# Altium PCB PCI Express Mini_3000X2680_52PIN_Half-Mini-Type H2.PCBDOC
Units mm, origin at the board's own origin, x right, y up, seen from the top; angles counter-clockwise.
Board outline 30 x 26.8 mm, 4 copper layers (TopLayer, InternalPlane1, InternalPlane2, BottomLayer); 19 components, 38 nets, 168 pads, 22 vias.
Unrouted connection lines stored in the file: 69.
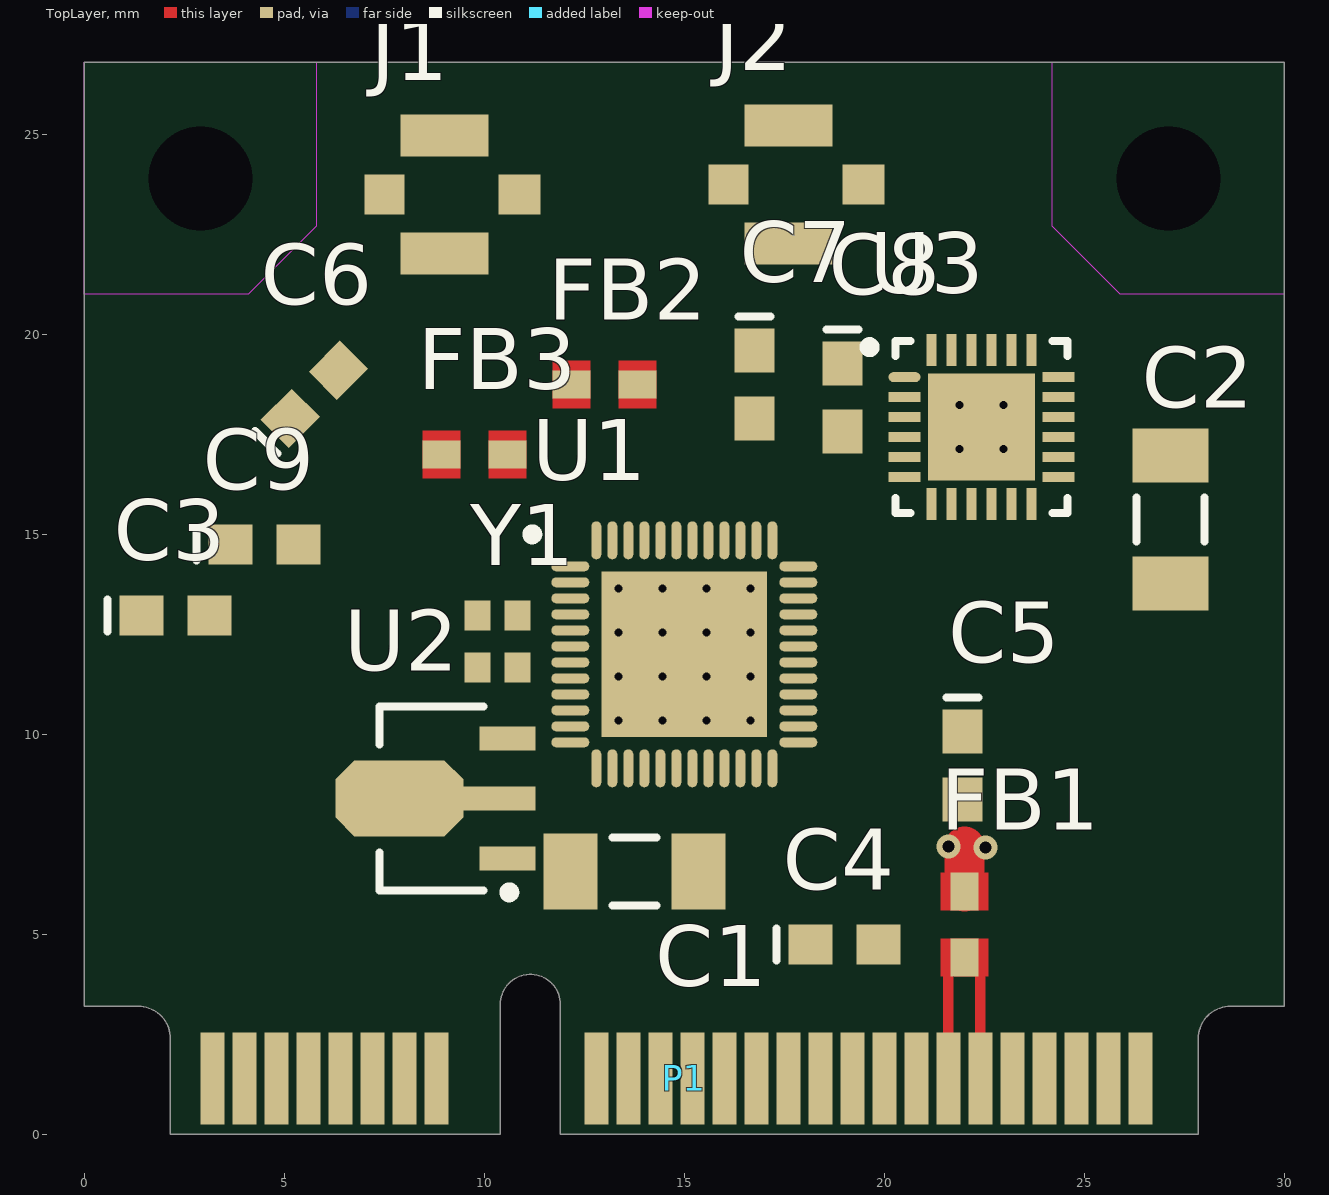
[diagram p0: TopLayer view]
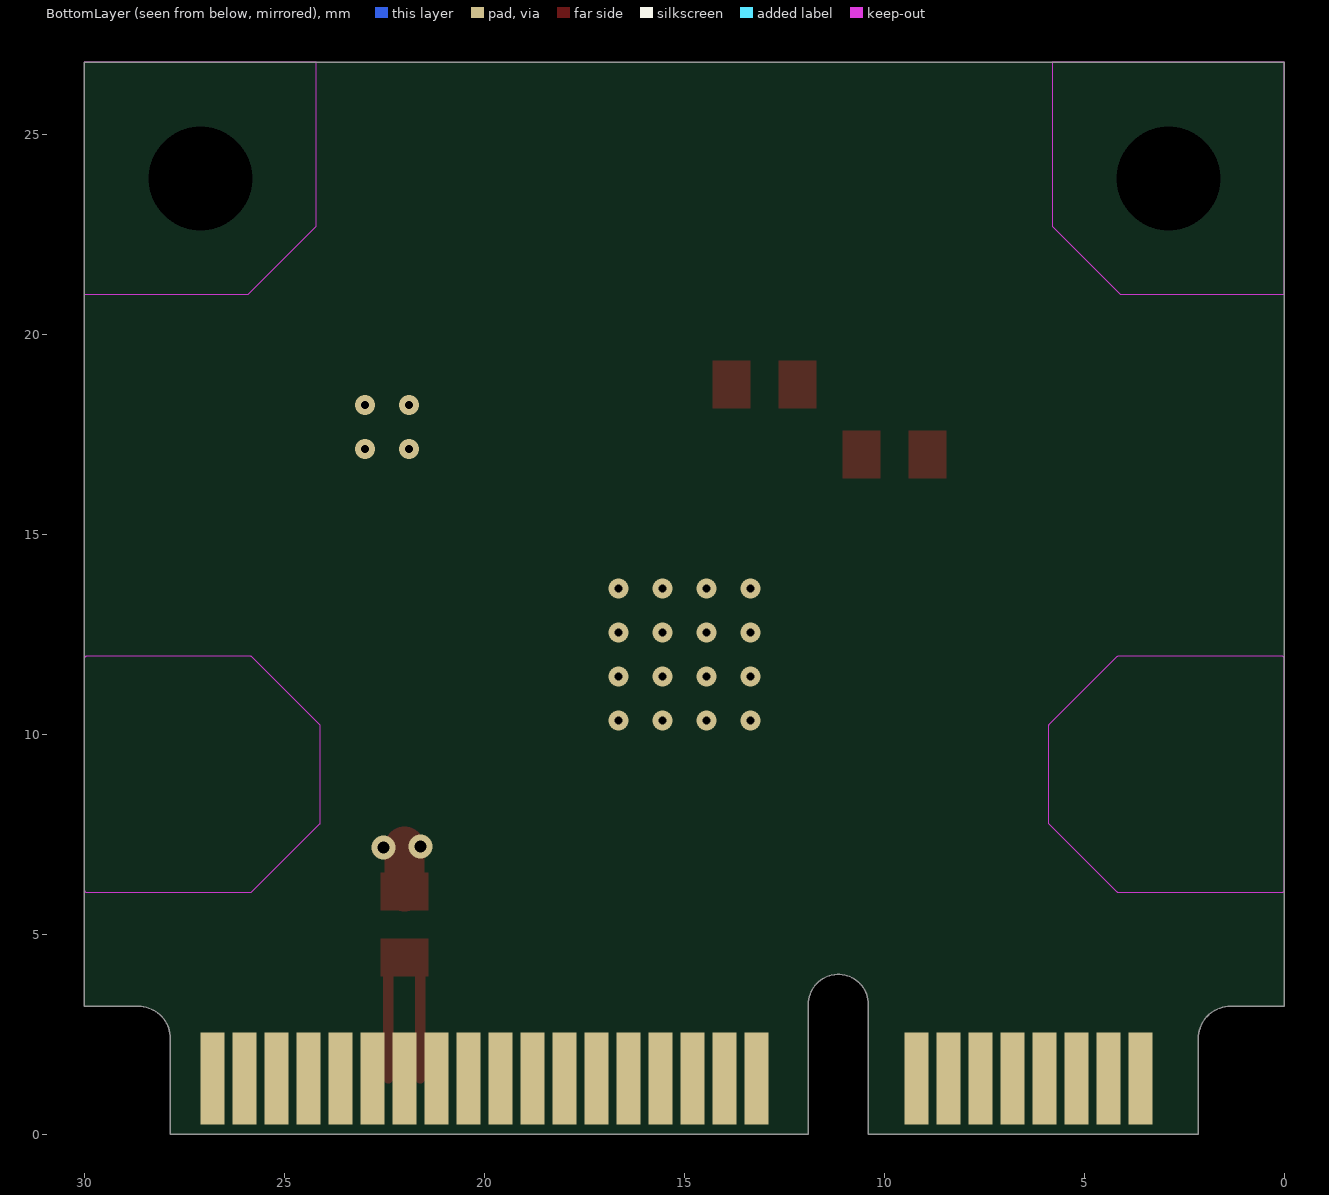
[diagram p1: BottomLayer view, seen from below]
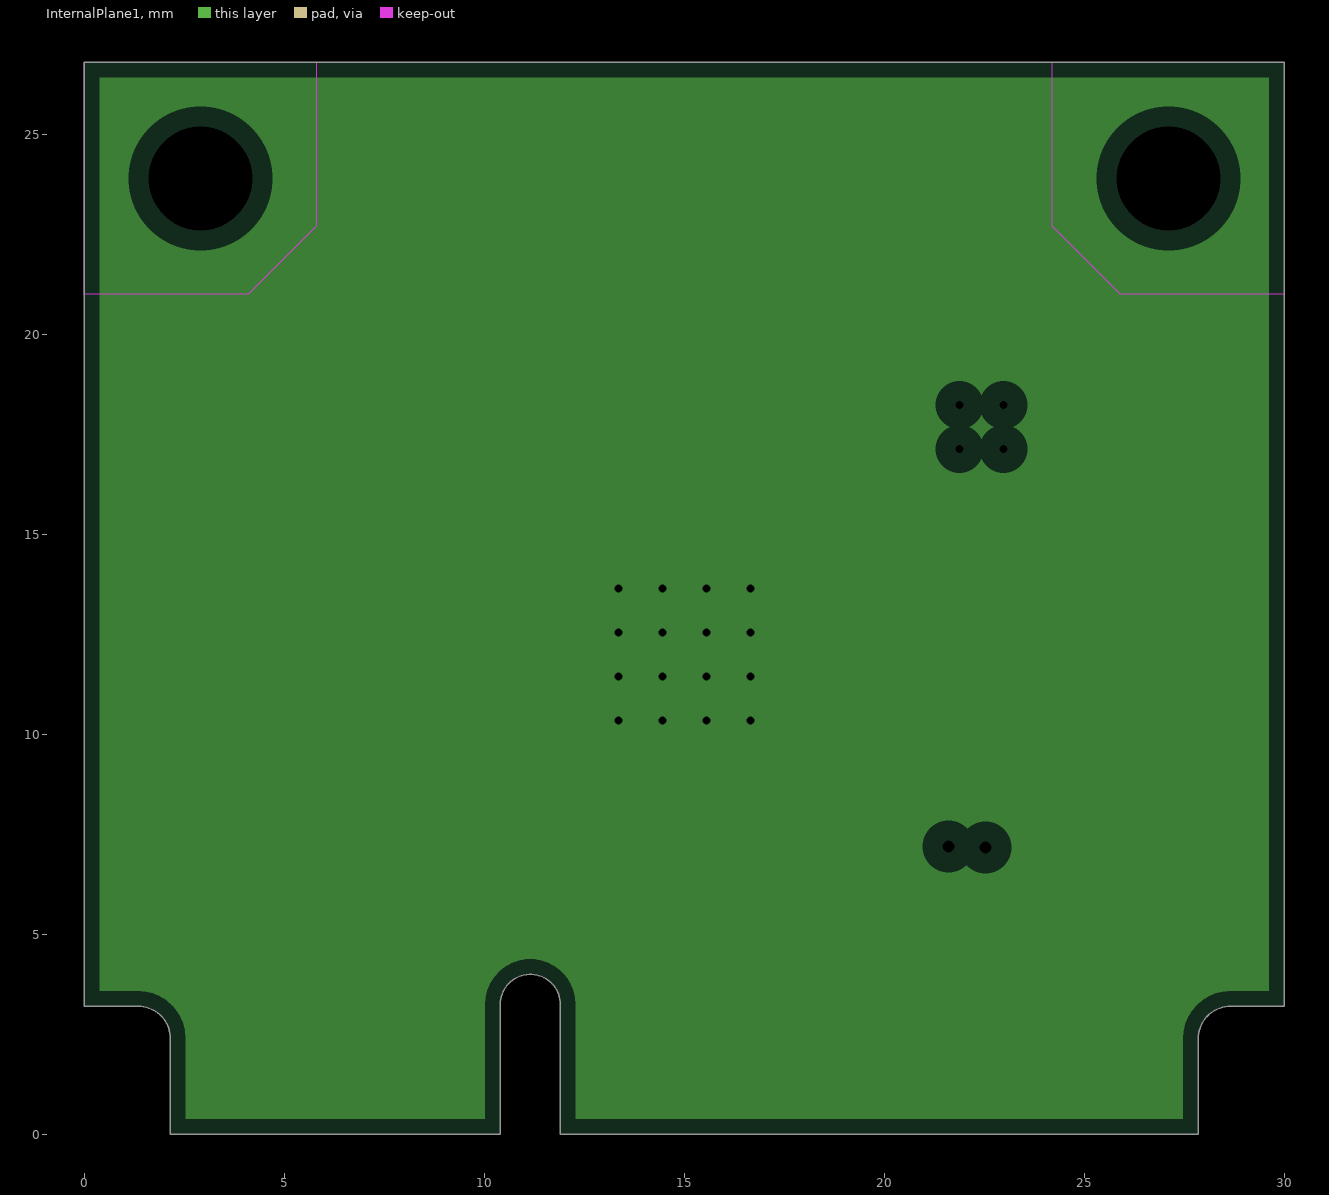
[diagram p2: InternalPlane1, clearances drawn from the general rule]
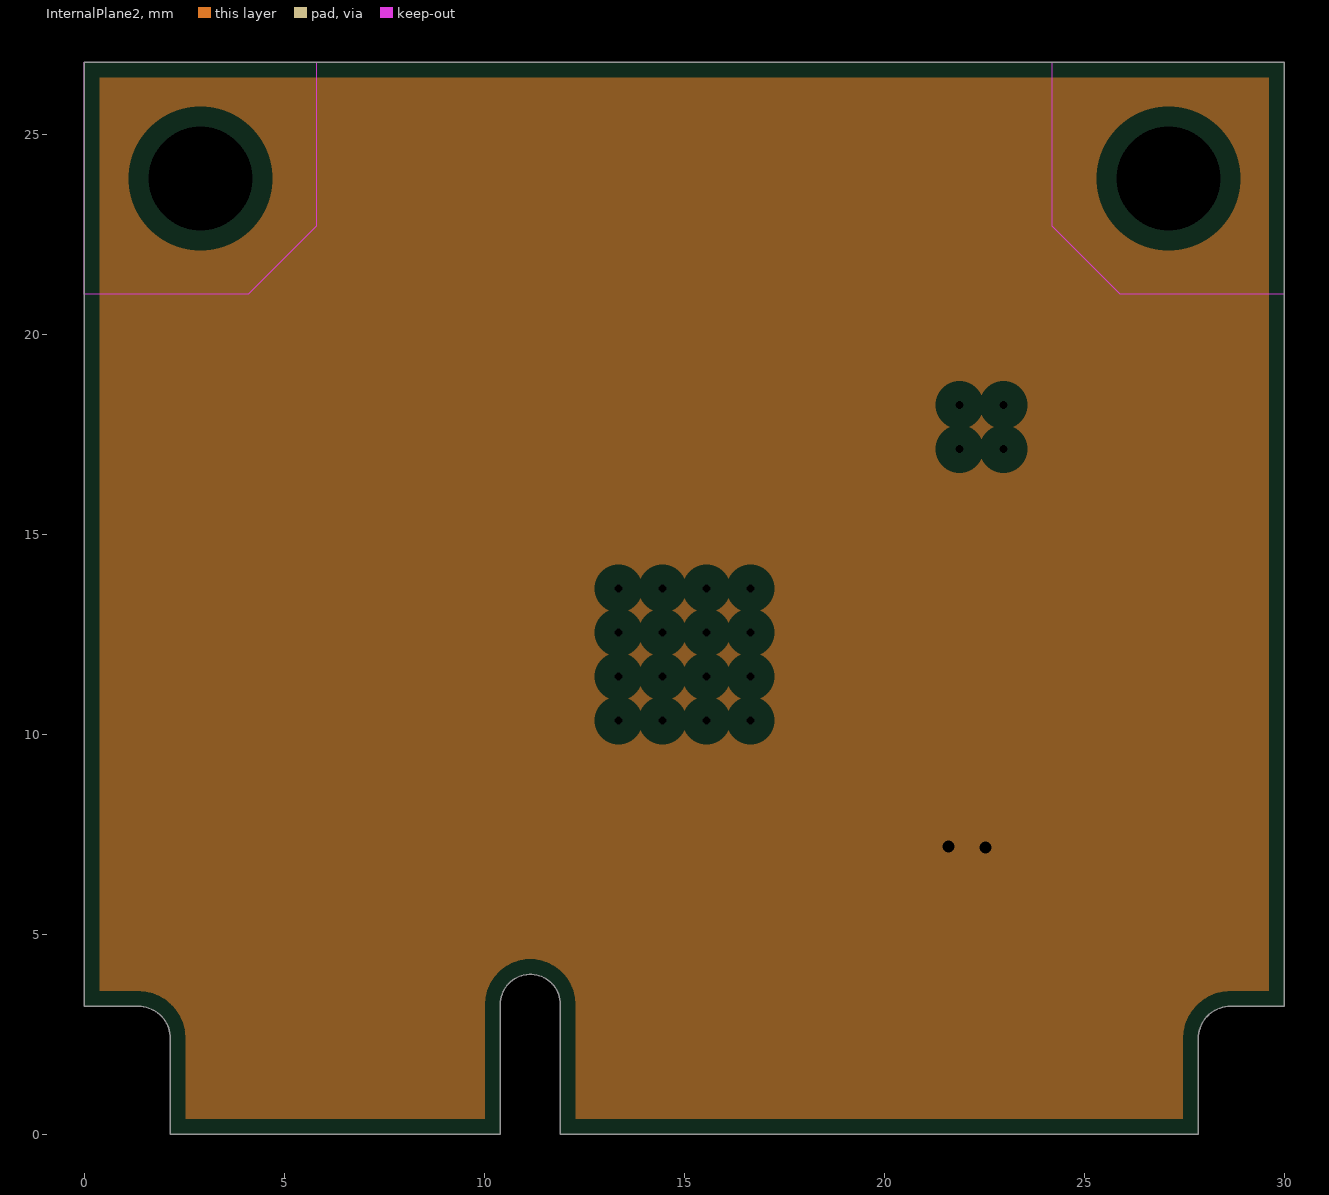
[diagram p3: InternalPlane2, clearances drawn from the general rule]

## Layer stack, top to bottom
TopSolder: solder mask 0.0102, Solder Resist, Dk 3.5
TopLayer: signal copper 0.0178
Dielectric1: core 0.32, FR-4, Dk 4.8
InternalPlane1: plane copper 0.0356, net GND
Dielectric2: prepreg 0.32, FR-4, Dk 4.8
InternalPlane2: plane copper 0.0356, net 3.3V
Dielectric3: core 0.32, FR-4, Dk 4.8
BottomLayer: signal copper 0.0178
BottomSolder: solder mask 0.0102, Solder Resist, Dk 3.5

## Board outline
2.15,2.4 ccw(c1.35,2.4) 1.35,3.2 0,3.2 0,26.8 30,26.8 30,3.2 28.65,3.2 ccw(c28.65,2.4) 27.85,2.4 27.85,0 11.9,0 11.9,3.25 ccw(c11.15,3.25) 10.4,3.25 10.4,0 2.15,0

## Design rules (kind name [scope] priority, off if disabled: settings)
Clearance "Clearance_Edge Connector" [(InComponentClass('Edge Connector')) vs (InComponentClass('Edge Connector'))] p1: gap=0.2 ignorepadtopadclearanceinfootprint=FALSE except(0: Arc-Hole Track-Hole SMDPad-Hole THPad-Hole Via-Hole Fill-Hole Poly-Hole Region-Hole Text-Hole)
Clearance [All] p2: gap=0.254 ignorepadtopadclearanceinfootprint=FALSE except(0: Arc-Hole Track-Hole SMDPad-Hole THPad-Hole Via-Hole Fill-Hole Poly-Hole Region-Hole Text-Hole; 0.15: SMDPad-SMDPad)
DiffPairsRouting [All] p1: maxlimit=0.254 minlimit=0.254 mostfreqgap=0.254 toplayer_minwidth=0.381 toplayer_maxwidth=0.381 toplayer_prefwidth=0.381 bottomlayer_minwidth=0.381 bottomlayer_maxwidth=0.381 bottomlayer_prefwidth=0.381 maxuncoupledlength=12.7
FabricationTestPointUsage TestPointUsage [All] p1: valid=0 allowmultiple=FALSE
FabricationTestpoint Testpoint [All] p1: side=3 testpointundercomponent=TRUE minsize=1.016 maxsize=2.54 preferedsize=1.524 minholesize=0.508 maxholesize=1.016 preferedholesize=0.813 testpointgrid=0.025 allowsidetop=TRUE allowsidebottom=TRUE usegrid=TRUE gridtolerance=0
Height "PCI Express Mini, \"Component height constraints\", Page 18, bottom side" [OnBottomLayer] p1: minheight=0 maxheight=1.35 prefheight=1.35
Height "PCI Express Mini, \"Component height constraints\", Page 18, top side" [OnTopLayer] p2: minheight=0 maxheight=2.4 prefheight=2.4
PlaneClearance [All] p1: clearance=0.5
PlaneConnect [All] p1: planeconnectstyle=Relief reliefexpansion=0.508 reliefentries=4 reliefconductorwidth=0.254 reliefairgap=0.254
PolygonConnect [All] p1: connectstyle=Relief reliefconductorwidth=0.254 reliefentries=4 polygonreliefangle="90 Angle" airgapwidth=0.254
RoomDefinition "U_CON_PCI Express Mini_P1_52PIN" [InComponentClass('U_CON_PCI Express Mini_P1_52PIN')] p1: confinementstyle=ConfineOut formatcopy=TRUE lockcomponents=FALSE outline 0,5.1 30,5.1 30,3.138 28.65,3.138 28.321,3.064 28.092,2.915 27.915,2.666 27.85,2.354 27.85,0 2.15,0 2.15,2.354 2.083,2.69 1.956,2.89 1.626,3.089 1.35,3.138 0,3.138
RoomDefinition RTL [InComponentClass('RTL')] p2: confinementstyle=ConfineOut formatcopy=TRUE lockcomponents=FALSE outline 1.35,3.2 1.4,3.25 10.2,3.25 10.2,4.2 12.1,4.2 12.1,3.25 12.15,3.2 28.45,3.2 ccw(c28.45,2.888) 28.229,3.109 28.016,2.896 ccw(c28.417,2.494) 27.85,2.494 27.85,0 2.15,0 2.15,2.513 ccw(c1.574,2.513) 1.981,2.921 1.814,3.088 ccw(c1.727,3.002) 1.727,3.124 ccw(c1.544,2.941) 1.544,3.2
RoutingVias [All] p1: holewidth=0.711 width=1.27 viastyle="Through Hole" minholewidth=0.711 minwidth=1.27 maxholewidth=0.711 maxwidth=1.27
SilkToSolderMaskClearance SilkscreenOverComponentPads [IsPad] p1: minsilkscreentomaskgap=0.254 clearancetoexposedcopper=TRUE
SolderMaskExpansion [HasPad('J2-M2')] p1: expansion=0 istentingtop=FALSE
Width [All] p1: maxlimit=3 minlimit=0.15 preferedwidth=0.254
23 further rules are at their usual default settings.

## Classes and differential pairs
component class "U_CON_PCI Express Mini_P1_52PIN": P1
component class "Edge Connector": P1
component class RTL: C1 C2 C3 C4 C5 C6 C7 C8 C9 FB1 FB2 FB3 J1 J2 U1 U2 U3 Y1
differential pair USB_D: +USB_D_P -USB_D_N
differential pair REFCLK: +REFCLK_P -REFCLK_N
differential pair PET0: +PET0_P -PET0_N
differential pair PER0: +PER0_P -PER0_N

## Components (designator, comment, footprint, x,y, rotation, side; value= is the part's Value field where it differs from the comment)
C1 "CAP 1uF 25V 1206(3216)" CAPC1206(3216)130_M 13.75,6.575 r180 top value=1uF
C2 "CAP 1uF 25V 1206(3216)" CAPC1206(3216)130_M 27.15,15.375 r90 top value=1uF
C3 "C0603" 0603 2.275,12.975 r0 top value=100pF
C4 "C0603" 0603 19,4.75 r0 top value=100nF
C5 "C0603" 0603 21.95,9.225 r270 top value=100nF
C6 "C0603" 0603 5.75,18.5 r45 top value=100pF
C7 "C0603" 0603 16.75,18.75 r270 top value=100nF
C8 "C0603" 0603 18.95,18.425 r270 top value=100pF
C9 "C0603" 0603 4.5,14.75 r0 top value=100nF
FB1 "BLM18KG331SN1J" MURA-BLM18PG_KG-B25-CHIP-2_V1 22,5.25 r90 top
FB2 "BLM18KG331SN1J" MURA-BLM18PG_KG-B25-CHIP-2_V1 13,18.75 r0 top
FB3 "BLM18KG331SN1J" MURA-BLM18PG_KG-B25-CHIP-2_V1 9.75,17 r0 top
J1 "u.fl jack smd" "U.FL jack" 9,23.5 r0 top
J2 "u.fl jack smd" "U.FL jack" 17.6,23.75 r0 top
P1 "PCIeMini-CN-2S-M-R52" PCIeMini-GF-2D-800-1K-S52 15,1.4 r0 top locked
U1 "RTL2832U" QFN40P600X600X84_HS-49N 15,12 r0 top
U2 "MCP1700T-1202E/MB" SOT-89-MB3_N 8.675,8.4 r180 top
U3 "r820t" QFN50P400X400X85_HS-25N_r820t 22.432,17.68 r0 top
Y1 "Crystal" Abracon_ABM11 10.325,12.325 r90 top

## Footprints (in the part's own frame and the unit in brackets; to place one, negate y for a bottom-side part, rotate by r counter-clockwise, add the part's x,y. Pads: shape width x height; smd on the part's side, far side on the other; paste and mask are expansions set on the pad)
0603 [mm] "Chip Capacitor; Body 1.6 x 0.8 mm (LxW typ)"
  rect 1.1x1 smd: 1(-0.85,0) 2(0.85,0)
  silkscreen extent -1.7,-0.4 -1.7,0.4
Abracon_ABM11 [mm]
  rect 0.75x0.65 smd: 1(-0.65,-0.5) 2(0.65,-0.5) 3(0.65,0.5) 4(-0.65,0.5)
  body extent -1,-0.8 1,0.8, height 0.59
CAPC1206(3216)130_M [mm] "Chip Capacitor, Body 3.2x1.6mm, Height 1.3mm, IPC Low Density"
  rect 1.35x1.9 smd: 1(-1.6,0) 2(1.6,0)
  silkscreen extent -0.55,-0.85 0.55,0.85, body extent -1.7,-0.9 1.7,0.9, height 1.3
MURA-BLM18PG_KG-B25-CHIP-2_V1 [mm] "Chip Ferrite Bead, 2-Leads, Body 1.6x0.8mm, Pitch 1.65mm, Flow Soldering, 18um Land Pad Thickness"
  rect 0.95x0.7 smd mask+0: 1(-0.825,0) 2(0.825,0)
  TopLayer region: -1.3,-0.6 -0.35,-0.6 -0.35,0.6 -1.3,0.6
  TopLayer region: 0.35,-0.6 1.3,-0.6 1.3,0.6 0.35,0.6
  body extent -0.87,-0.48 0.88,0.48, height 0.95
PCIeMini-GF-2D-800-1K-S52 [mm] "Golden finger, PCIeMini, Dual, Staggered, Pitch 0.8mm, 52-Position"
  rect 0.6x2.3 smd paste-0.9: 1(-11.8,0) 3(-11,0) 5(-10.2,0) 7(-9.4,0) 9(-8.6,0) 11(-7.8,0) 13(-7,0) 15(-6.2,0) 17(-2.2,0) 19(-1.4,0) 21(-0.6,0) 23(0.2,0) 25(1,0) 27(1.8,0) 29(2.6,0) 31(3.4,0) 33(4.2,0) 35(5,0) 37(5.8,0) 39(6.6,0) 41(7.4,0) 43(8.2,0) 45(9,0) 47(9.8,0) 49(10.6,0) 51(11.4,0)
  rect 0.6x2.3 smd far side paste-0.9: 2(-11.4,0) 4(-10.6,0) 6(-9.8,0) 8(-9,0) 10(-8.2,0) 12(-7.4,0) 14(-6.6,0) 16(-5.8,0) 18(-1.8,0) 20(-1,0) 22(-0.2,0) 24(0.6,0) 26(1.4,0) 28(2.2,0) 30(3,0) 32(3.8,0) 34(4.6,0) 36(5.4,0) 38(6.2,0) 40(7,0) 42(7.8,0) 44(8.6,0) 46(9.4,0) 48(10.2,0) 50(11,0) 52(11.8,0)
QFN40P600X600X84_HS-49N [mm] "QFN, 48-Leads, Body 6,00x6,00mm, Pitch 0,40mm, Thermal Pad 4,14x4,14mm, IPC Medium Density"
  oval 0.95x0.25 smd: 1(-2.85,2.2) 2(-2.85,1.8) 3(-2.85,1.4) 4(-2.85,1) 5(-2.85,0.6) 6(-2.85,0.2) 7(-2.85,-0.2) 8(-2.85,-0.6) 9(-2.85,-1) 10(-2.85,-1.4) 11(-2.85,-1.8) 12(-2.85,-2.2) 25(2.85,-2.2) 26(2.85,-1.8) 27(2.85,-1.4) 28(2.85,-1) 29(2.85,-0.6) 30(2.85,-0.2) 31(2.85,0.2) 32(2.85,0.6) 33(2.85,1) 34(2.85,1.4) 35(2.85,1.8) 36(2.85,2.2)
  oval 0.25x0.95 smd: 13(-2.2,-2.85) 14(-1.8,-2.85) 15(-1.4,-2.85) 16(-1,-2.85) 17(-0.6,-2.85) 18(-0.2,-2.85) 19(0.2,-2.85) 20(0.6,-2.85) 21(1,-2.85) 22(1.4,-2.85) 23(1.8,-2.85) 24(2.2,-2.85) 37(2.2,2.85) 38(1.8,2.85) 39(1.4,2.85) 40(1,2.85) 41(0.6,2.85) 42(0.2,2.85) 43(-0.2,2.85) 44(-0.6,2.85) 45(-1,2.85) 46(-1.4,2.85) 47(-1.8,2.85) 48(-2.2,2.85)
  rect 4.14x4.14 smd: 49(0,0)
  silkscreen extent -3.92,2.88 -3.67,3.12, body extent -3.01,-3.01 3.01,3.01, height 0.84
QFN50P400X400X85_HS-25N_r820t [mm] "QFN, 24-Leads, Body 4,00x4,00mm, Pitch 0,50mm, Thermal Pad 2,68x2,68mm, IPC Medium Density"
  oval 0.8x0.25 smd: 1(-1.925,1.25)
  rect 0.8x0.25 smd: 2(-1.925,0.75) 3(-1.925,0.25) 4(-1.925,-0.25) 5(-1.925,-0.75) 6(-1.925,-1.25) 13(1.925,-1.25) 14(1.925,-0.75) 15(1.925,-0.25) 16(1.925,0.25) 17(1.925,0.75) 18(1.925,1.25)
  rect 0.25x0.8 smd: 7(-1.25,-1.925) 8(-0.75,-1.925) 9(-0.25,-1.925) 10(0.25,-1.925) 11(0.75,-1.925) 12(1.25,-1.925) 19(1.25,1.925) 20(0.75,1.925) 21(0.25,1.925) 22(-0.25,1.925) 23(-0.75,1.925) 24(-1.25,1.925)
  rect 2.68x2.68 smd: 25(0,0)
  silkscreen extent -2.92,-2.15 2.15,2.15, body extent -2.02,-2.02 2.02,2.02, height 0.85
SOT-89-MB3_N [mm] "SOT89, 3-Leads, Body 4.5x2.4 mm, Pitch 1.5mm, Lead Span 4.1mm, IPC Medium Density"
  rect 1.4x0.6 smd: 1(-1.9,1.5) 3(-1.9,-1.5)
  rect 1.8x0.6 smd: 2(-1.7,0)
  oct 3.2x1.9 smd: 2(0.8,0)
  silkscreen extent -2.08,-2.3 1.3,2.47, body extent -1.3,-2.3 1.3,2.3, height 1.6
"U.FL jack" [mm] "U.FL smd jack AMPhenol RF AMC series"
  rect 1.05x1 smd: 1(1.875,0)
  rect 1x1 smd: 2(-1.5,0)
  rect 2.2x1.05 smd: 2(0,-1.475) 2(0,1.475)
  body extent -1.5,-1.5 1.6,1.5, height 1.25

## Part data
C1 C2: library part CMP-1037-04700-1, "CAP 1uF 25V ±10% 1206 (3216 Metric) Thickness 1.3mm SMD", Case-EIA=1206, Case-Metric=3216, Rated Voltage="25 V", Tolerance=Â±10%, Max Thickness="1.3 mm", Technology=SMT
C3 C4 C5 C6 C7 C8 C9: "Ceramic Chip Capacitor - Standard", PackageDocument=Mar-2001, Code_IPC="1608 [0603]", Code_JEITA=0603, ComponentLink1Description="Manufacturer Link", ComponentLink1URL=http://www.kemet.com/, ComponentLink2Description=Datasheet, ComponentLink2URL=http://www.kemet.com/kemet/web/homepage/kechome.nsf/vapubfilesname/F3102TA.pdf/$file/F3102TA.pdf, DatasheetDocument=Mar-2001, LatestRevisionDate=19-Mar-2004, LatestRevisionNote="Silkscreen size reduced.", Note="Footprint corresponds to dimensions for bulk cassette packaging. This case size has tightened tolerances.", PackageReference=0603, Published=17-Jul-2002, Publisher="Altium Limited"
FB1 FB2 FB3: library part CMP-0686-00560-6, "Chip Ferrite Bead for Power Lines (Low DC Resistance Type), 330 Ohm, 1700 mA, -55 to 125 degC, 1.6 x 0.8 x 0.95 mm SMD, Tape and Reel", DC Resistance="0.080 Ohm Max.", Manufacturer=Murata, Operating Temperature Range="-55 to 125 degC", Rated Current="1700 mA", ComponentLink1Description="Manufacturer URL", ComponentLink1URL=http://www.murata.com/, ComponentLink2Description=Datasheet, ComponentLink2URL=http://www.murata.com/products/catalog/pdf/c31e.pdf, ComponentLink3Description="Package Specification", ComponentLink3URL=http://www.murata.com/products/catalog/pdf/c31e.pdf, DatasheetVersion=08/2013, Impedance (at 100 MHz)="330 Ohm +/- 25%", Mounting Technology="Surface Mount", PackageDescription="2-Pin Chip, Body 1.6 x 0.8 mm", PackageReference=BLM18_H950-2, Packing="Tape and Reel", PartNumber=BLM18KG331SN1J
J1 J2: library part "u.fl connector, jack A-1JB", Frequency Max=6GHz, Manufacturer 1="Amphenol / Amphenol RF", Manufacturer Part Number 1=A-1JB, Supplier Part Number 1=523-A-1JB, Body Style="Straight Jack", Coaxial Termination=Solder, ComponentLink1Description=https://datasheet.ciiva.com/22652/689597-22652949.pdf, ComponentLink1URL=https://datasheet.ciiva.com/22652/689597-22652949.pdf, ComponentLink2Description=https://datasheet.ciiva.com/15172/getdatasheetpartid-168895-15172647.pdf, ComponentLink2URL=https://datasheet.ciiva.com/15172/getdatasheetpartid-168895-15172647.pdf, ComponentLink3Description=https://datasheet.ciiva.com/36526/2036357-36526267.pdf, ComponentLink3URL=https://datasheet.ciiva.com/36526/2036357-36526267.pdf, ComponentLink4Description=https://datasheet.ciiva.com/5175/ca-1jb-38743-5175829.pdf, ComponentLink4URL=https://datasheet.ciiva.com/5175/ca-1jb-38743-5175829.pdf, ComponentLink5Description=https://datasheet.ciiva.com/3132/ca-1jb-3132240.pdf, ComponentLink5URL=https://datasheet.ciiva.com/3132/ca-1jb-3132240.pdf, ComponentLink6Description=https://datasheet.ciiva.com/14157/04614608-14157589.pdf, ComponentLink6URL=https://datasheet.ciiva.com/14157/04614608-14157589.pdf, ComponentLink7Description=https://datasheet.ciiva.com/643/ca-1jb-643532.pdf, ComponentLink7URL=https://datasheet.ciiva.com/643/ca-1jb-643532.pdf, ComponentLink8Description=https://datasheet.ciiva.com/14565/70142555-14565783.pdf, ComponentLink8URL=https://datasheet.ciiva.com/14565/70142555-14565783.pdf, ComponentLink9Description=https://datasheet.ciiva.com/643/ca-1jb-643531.pdf, ComponentLink9URL=https://datasheet.ciiva.com/643/ca-1jb-643531.pdf, Connector Type="AMC Coaxial", Contact Material=Brass, Contact Plating=Gold, Impedance=50ohm, Pricing 1="1=0.65, 10=0.596, 50=0.535, 100=0.51, 1000=0.365, 10000=0.351 (USD)", Stock 1=19506, Supplier 1=Mouser
P1: library part CMP-0001-00067-2, "Golden finger, PCIeMini, Dual, Staggered, Pitch 0.8mm, 52-Position", Package Reference=PCIeMini-GF-2D-800-1K-S52, Package Version="rev1.2, Oct-2007", ClassName="Edge Connector", Datasheet Version="Revision 1.2 Oct-2007", Mating Connector=Tyco-292443-1, Publisher=Altium
U1: "RTL2832U DVB-T COFDM Demodulator + USB 2.0", Manufacturer=Realtek, Package=QFN48, ComponentLink1Description="Work on RTL2832U Datasheet", ComponentLink1URL=https://sites.google.com/site/oh2ftg/home/rtl2832u, Mounting="Surface Mount", Publisher=ftg
U2: library part CMP-0136-00829-1, "Low Quiescent Current LDO, 3-Pin SOT-89, Extended Temperature, Tape and Reel", Code_IPC=SOT89, DatasheetVersion="revB, Feb-2007", PackageDescription="3-Lead Plastic Small Outline Transistor Header (MB) [SOT-89]", PackageReference=SOT-89-MB3, PackageVersion="revBB, Aug-2009"
Y1: library part XTAL_0024, "Crystal, 16MHz, 10pF, 4-SMD (2x1.6)", Frequency=16MHz, Load Capacitance=10pF, Manufacturer=Abracon, Manufacturer P/N=ABM11-16.000MHZ-D2X-T3, Operating Temp Range="-40C - 85C", Package="4-SMD (2x1.6)", Tolerance=20ppm, Author=JDS, Datasheet=http://www.abracon.com/Resonators/ABM11.pdf, Date=3/28/2016, P/N=XTAL_0024, Supplier=Digikey, Supplier P/N=535-12629-1-ND, Supplier Price=1.04, Type=Crystal

## Free pads (board coordinates)
  round 2.3 hole 2.6 unplated: MH1(2.9,23.9) MH2(27.1,23.9)

## Via types
v1: diameter 0.5, hole 0.2, TopLayer to BottomLayer, 20 vias
v2: diameter 0.6, hole 0.3, TopLayer to BottomLayer, 2 vias

## Nets (pads, with @x,y where several pads share a name; then routed paths per layer and width w, separated by ;. In a path a pad name is that pad's centre, name@x,y a point inside that pad or via, vN(x,y) a via of type N, cw(c..) or ccw(c..) an arc to the next point about the centre after c; other vN are vias at no path point)
1V2: C2.2 C8.2 FB3.1 U1.12 U1.20 U1.28 U1.34 U2.3
3.3V: C6.2 FB2.1
3V3: C1.2 C5.2 FB1.2 U1.14 U1.25 U1.26 U1.33 U2.2 U3.2 U3.18 | length 1.1
  TopLayer w1: FB1.2 22,7.2
  other v2: 22.525,7.175 21.6,7.2
+1.5V: P1.6 P1.28 P1.48
+3.3VAUX: C3.2 C4.2 FB1.1 P1.2 P1.24 P1.39 P1.41 P1.52 | length 6.4
  TopLayer w0.254: P1.39 21.6,4.025 FB1.1 22.4,4.025 P1.41
CLKREQ#: P1.7
COEX1: P1.3
COEX2: P1.5
GND: C1.1 C2.1 C3.1 C4.1 C5.1 C6.1 C7.1 C8.1 C9.1 J1.2 J2.2 P1.4 P1.9 P1.15 P1.18 P1.21 P1.26 P1.27 P1.29 P1.34 P1.35 P1.37 P1.40 P1.43 P1.50 U1.3 U1.8 U1.45 U1.49 U2.1 Y1.2 Y1.4
  other v1: 13.35,10.35 14.45,10.35 15.55,10.35 16.65,10.35 13.35,11.45 14.45,11.45 15.55,11.45 16.65,11.45 13.35,12.55 14.45,12.55 15.55,12.55 16.65,12.55 13.35,13.65 14.45,13.65 15.55,13.65 16.65,13.65
LED_WLAN#: P1.44
LED_WPAN#: P1.46
LED_WWAN#: P1.42
NetC10_1: U3.24
NetC10_2: J1.1
NetC11_1: J2.1
NetC11_2: U1.4
NetU1_10: U1.10 Y1.1
NetU1_11: U1.11 Y1.3
PER0_N: P1.23
PER0_P: P1.25
PERST#: P1.22
PET0_N: P1.31
PET0_P: P1.33
REFCLK_N: P1.11
REFCLK_P: P1.13
SMB_CLK: P1.30
SMB_DATA: P1.32
UIM_CLK: P1.12
UIM_DATA: P1.10
UIM_PWR: P1.8
UIM_RESET: P1.14
UIM_VPP: P1.16
USB_D_N: P1.36 U1.41
USB_D_P: P1.38 U1.40
VDDA1: C9.2 FB3.2 U1.44 U1.47
VDDA3: C7.2 FB2.2 U1.43 U3.17
W_DISABLE#: P1.20
WAKE#: P1.1
pads on no net: P1.17 P1.19 P1.45 P1.47 P1.49 P1.51 U1.1 U1.2 U1.5 U1.6 U1.7 U1.9 U1.13 U1.15 U1.16 U1.17 U1.18 U1.19 U1.21 U1.22 U1.23 U1.24 U1.27 U1.29 U1.30 U1.31 U1.32 U1.35 U1.36 U1.37 U1.38 U1.39 U1.42 U1.46 U1.48 U3.1 U3.3 U3.4 U3.5 U3.6 U3.7 U3.8 U3.9 U3.10 U3.11 U3.12 U3.13 U3.14 U3.15 U3.16 U3.19 U3.20 U3.21 U3.22 U3.23 U3.25
copper on no net:
  other v1: 21.882,17.13 22.982,17.13 21.882,18.23 22.982,18.23

## Polygon pours and split planes (outlines as drawn)
GND on InternalPlane1 (split plane): 29.617,3.583 28.65,3.583 28.65,3.584 28.496,3.573 28.344,3.543 28.197,3.493 28.058,3.425 27.93,3.339 27.813,3.237 27.711,3.12 27.625,2.992 27.557,2.853 27.507,2.706 27.477,2.554 27.466,2.4 27.467,2.4 27.467,0.383 12.283,0.383 12.283,3.25 12.274,3.398 12.245,3.543 12.197,3.684 12.132,3.817 12.049,3.94 11.951,4.051 11.84,4.149 11.717,4.232 11.584,4.297 11.443,4.345 11.298,4.374 11.15,4.383 11.002,4.374 10.857,4.345 10.716,4.297 10.583,4.232 10.46,4.149 10.349,4.051 10.251,3.94 10.168,3.817 10.103,3.684 10.055,3.543 10.026,3.398 10.017,3.25 10.017,0.383 2.533,0.383 2.533,2.4 2.534,2.4 2.523,2.554 2.493,2.706 2.443,2.853 2.375,2.992 2.289,3.12 2.187,3.237 2.07,3.339 1.942,3.425 1.803,3.493 1.656,3.543 1.504,3.573 1.35,3.584 1.35,3.583 0.383,3.583 0.383,26.417 29.617,26.417
3V3 on InternalPlane2 (split plane): 29.617,3.583 28.65,3.583 28.65,3.584 28.496,3.573 28.344,3.543 28.197,3.493 28.058,3.425 27.93,3.339 27.813,3.237 27.711,3.12 27.625,2.992 27.557,2.853 27.507,2.706 27.477,2.554 27.466,2.4 27.467,2.4 27.467,0.383 12.283,0.383 12.283,3.25 12.274,3.398 12.245,3.543 12.197,3.684 12.132,3.817 12.049,3.94 11.951,4.051 11.84,4.149 11.717,4.232 11.584,4.297 11.443,4.345 11.298,4.374 11.15,4.383 11.002,4.374 10.857,4.345 10.716,4.297 10.583,4.232 10.46,4.149 10.349,4.051 10.251,3.94 10.168,3.817 10.103,3.684 10.055,3.543 10.026,3.398 10.017,3.25 10.017,0.383 2.533,0.383 2.533,2.4 2.534,2.4 2.523,2.554 2.493,2.706 2.443,2.853 2.375,2.992 2.289,3.12 2.187,3.237 2.07,3.339 1.942,3.425 1.803,3.493 1.656,3.543 1.504,3.573 1.35,3.584 1.35,3.583 0.383,3.583 0.383,26.417 29.617,26.417

## Keep-outs
BottomLayer:
  region: 29.998,11.9 29.998,6.1 cw(c29.948,6.1) 29.948,6.05 25.848,6.05 cw(c25.848,6.1) 25.812,6.065 25.812,6.064 24.112,7.764 cw(c24.148,7.8) 24.097,7.8 24.097,10.2 cw(c24.148,10.2) 24.112,10.236 25.812,11.936 25.812,11.935 cw(c25.848,11.9) 25.848,11.95 29.948,11.95 cw(c29.948,11.9)
  region: 0.002,6.1 0.002,11.9 cw(c0.052,11.9) 0.052,11.95 4.152,11.95 cw(c4.152,11.9) 4.188,11.935 4.188,11.936 5.888,10.236 cw(c5.852,10.2) 5.903,10.2 5.903,7.8 cw(c5.852,7.8) 5.888,7.764 4.188,6.064 4.188,6.065 cw(c4.152,6.1) 4.152,6.05 0.052,6.05 cw(c0.052,6.1)
KeepOutLayer:
  region: 25.9,21 24.2,22.7 24.2,26.8 30,26.8 30,21 hole: 28.411,23.9 28.367,24.239 28.236,24.556 28.027,24.827 27.756,25.036 27.439,25.167 27.1,25.211 26.761,25.167 26.444,25.036 26.173,24.827 25.964,24.556 25.833,24.239 25.789,23.9 25.833,23.561 25.964,23.244 26.173,22.973 26.444,22.764 26.761,22.633 27.1,22.589 27.439,22.633 27.756,22.764 28.027,22.973 28.236,23.244 28.367,23.561
  region: 5.8,22.7 4.1,21 0,21 0,26.8 5.8,26.8 hole: 2.9,25.211 2.561,25.167 2.244,25.036 1.973,24.827 1.764,24.556 1.633,24.239 1.589,23.9 1.633,23.561 1.764,23.244 1.973,22.973 2.244,22.764 2.561,22.633 2.9,22.589 3.239,22.633 3.556,22.764 3.827,22.973 4.036,23.244 4.167,23.561 4.211,23.9 4.167,24.239 4.036,24.556 3.827,24.827 3.556,25.036 3.239,25.167

## Silkscreen, mask and mechanical layers (free items; w line width, h text height)
PCI-SIG Outline:
  the board outline again, w0.1
PCI-SIG Notes:
  text "Component and routing (all layers)" at 1.25,33 h1
  text "keep out area for hold down solutions" at 0,31.5 h1
  text "- Room for component keep out on top layer is approximated" at 35.25,8.85 h1.52
  text "- Nominal values used, dimensions in mm" at 35,5.75 h1.52
  text "- Pin 2 and pin52, pin 6 and 48 might be same, see PCI_Express_Mini_CEM_12_26Oct07_ncb.pdf, page 50 and 51" at 35,4.5 h1.52
  text "- Component height rule derived from PCI_Express_Mini_CEM_12_26Oct07_ncb.pdf, Page 18" at 35,2 h1.52
  text "- Stackup is not specified in PCI_Express_Mini_CEM_12_26Oct07_ncb.pdf" at 35,0.75 h1.52
  text "Component and exposed routing" at 1.1,-5.2 h1
  text "(bottom layer)keep out" at 4.5,-7 h1
  text "for hold down solutions" at 3.5,-8.75 h1

## Dimensions
25.848,6.045 to 21.666,-3.799 on PCI-SIG Notes
4.191,6.061 to 8.28,-3.596 on PCI-SIG Notes
24.2,26.8 to 21.666,31.349 on PCI-SIG Notes
0,26.8 to 30,26.8 on PCI-SIG Dimensions
27.85,0 to 30,26.8 on PCI-SIG Dimensions
5.8,26.8 to 8.28,31.146 on PCI-SIG Notes

## Text inside footprints (layer, text, board x,y; h text height)
FB1: PCI-SIG Notes "Land Pattern Adapted for Flow Soldering and 18um Land Pad Thickness" at 21.2,3.6 h0.05 r90
FB2: PCI-SIG Notes "Land Pattern Adapted for Flow Soldering and 18um Land Pad Thickness" at 11.35,19.55 h0.05
FB3: PCI-SIG Notes "Land Pattern Adapted for Flow Soldering and 18um Land Pad Thickness" at 8.1,17.8 h0.05